# EAGLE board SmartTraffic (EAGLE 9.6.2)
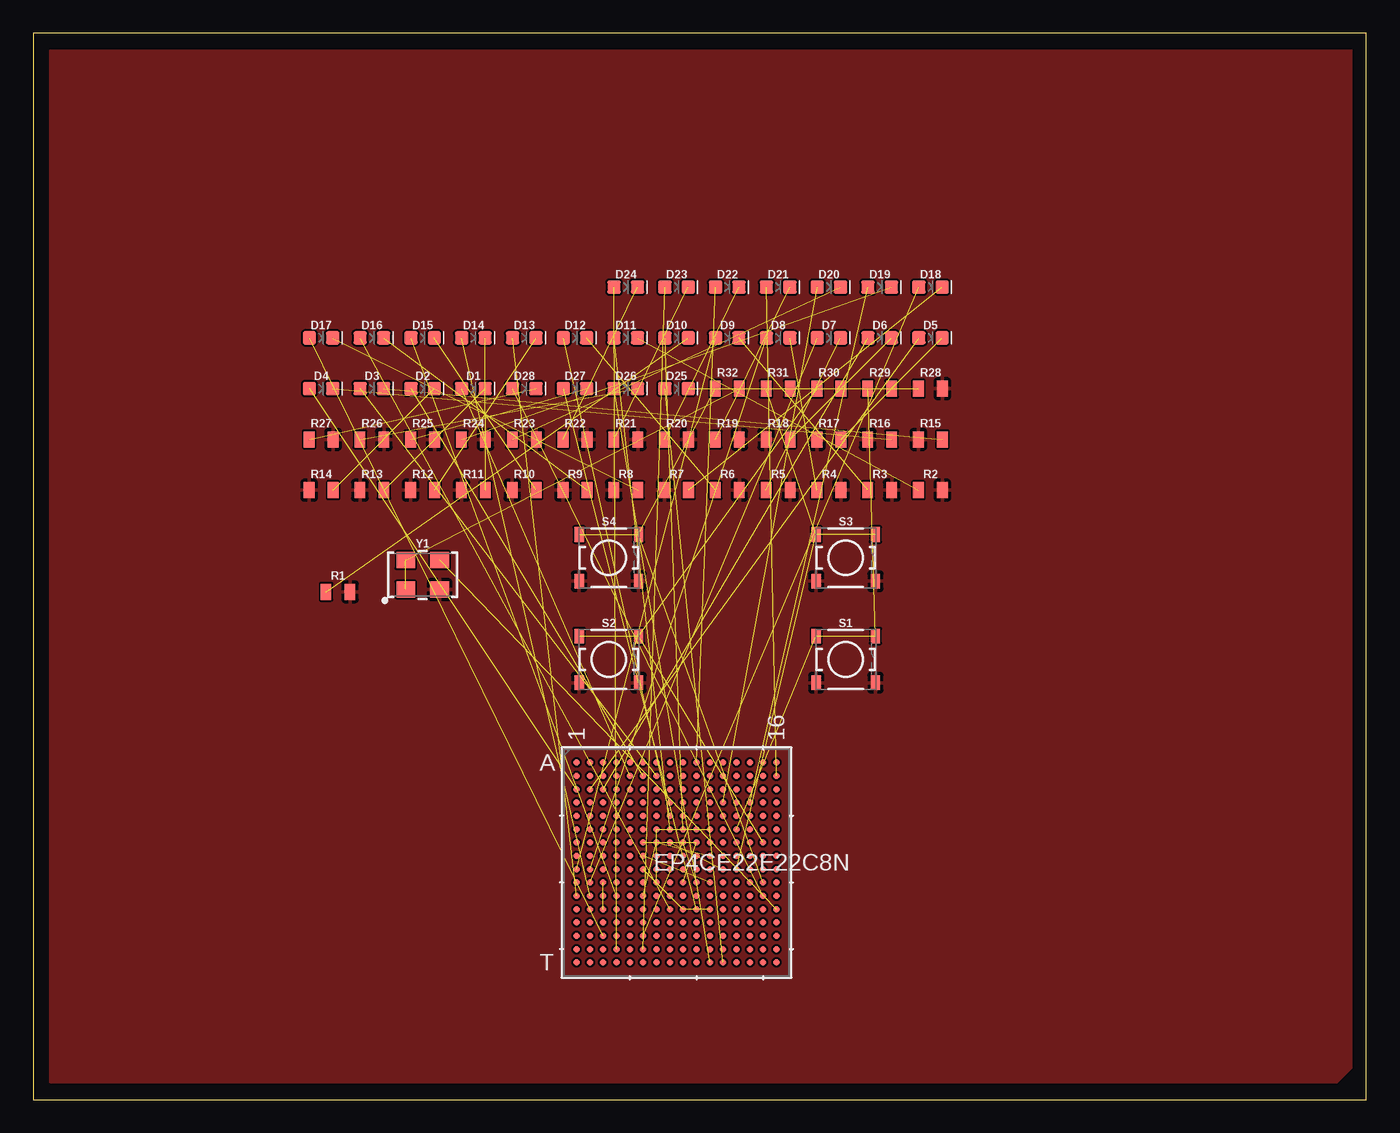
[diagram p0: board, top side]
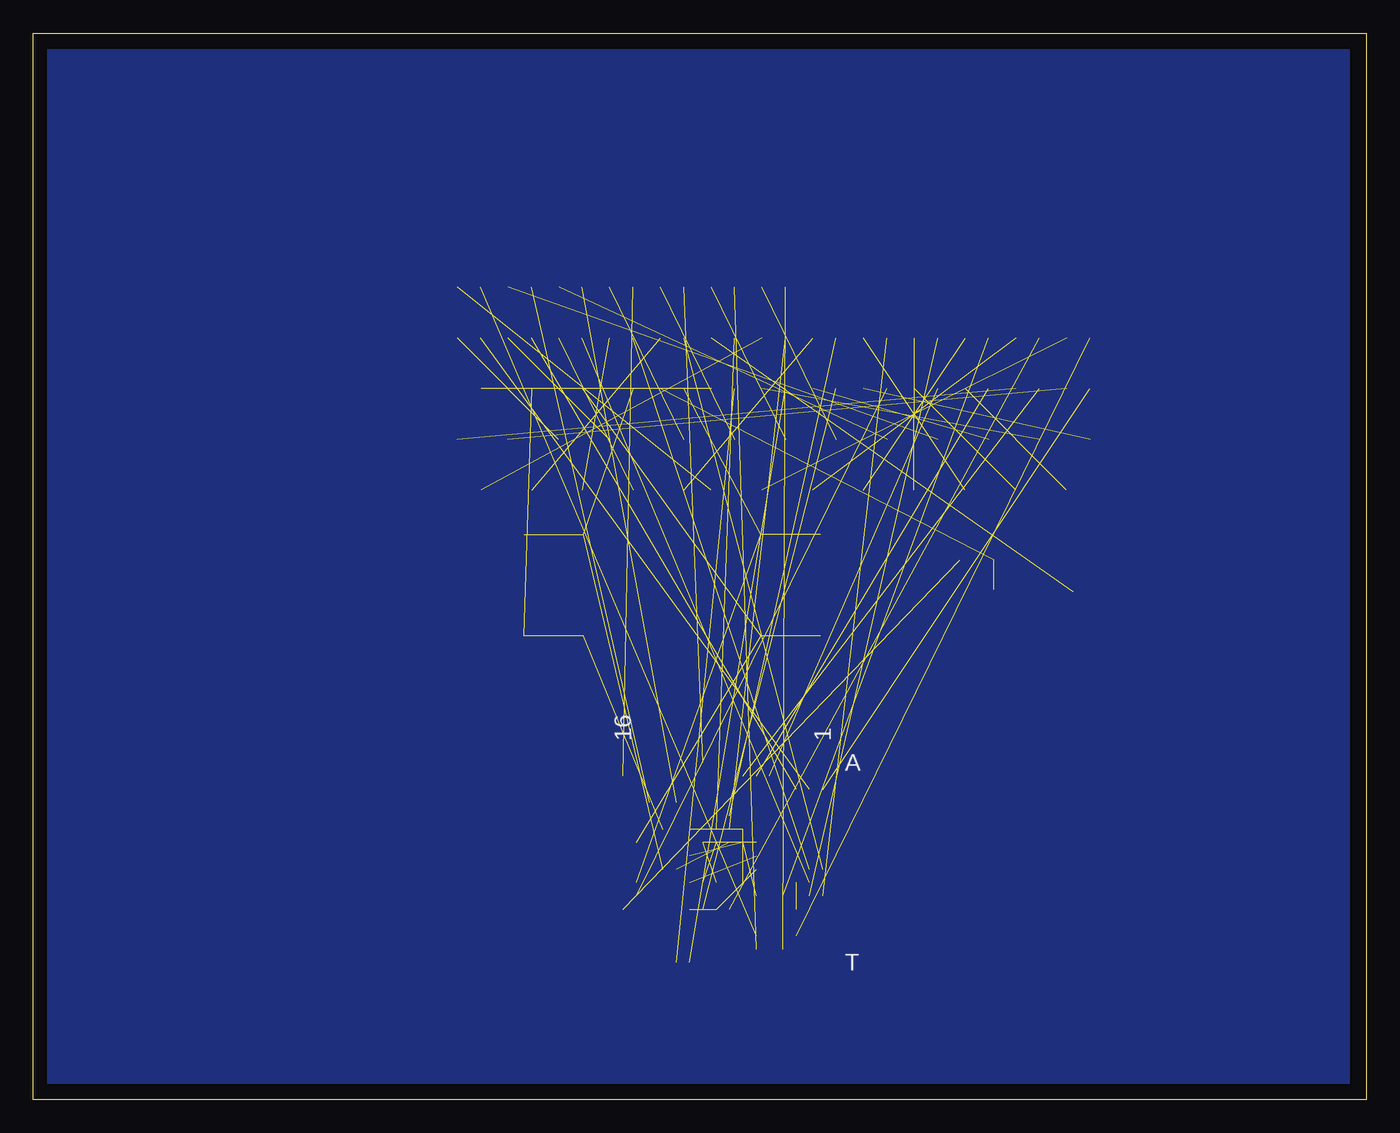
[diagram p1: board, bottom side, seen from below]

Size 100 x 80 mm. Coordinates in mm from the lower left corner, seen from the top.
Outline: 0,0 100,0 100,80 0,80 0,0
Copper layers (1*16): Top 0.035mm / dielectric 1.5mm / Bottom 0.035mm
Design rules "default": minimum track width 6mil, minimum drill 0.35mm, track to track 6mil, track to pad 6mil, pad to pad 6mil, via to via 6mil, smd to smd 6mil, copper to edge 40mil, drill to drill 6mil, minimum pad ring 10mil, minimum via ring 8mil, stop-mask expansion 4mil, vias tented up to drill 0mil, thermal gap 10mil

## Footprints (pad centres in the part's own frame; a part is rotated, then mirrored left to right if it is on the bottom)
LED-0603 = smd 1 x 1: A -0.877,0; C 0.877,0
0805 = smd 0.8 x 1.2: 1 -0.9,0; 2 0.9,0
TACTILE_SWITCH_SMD_4.5MM = smd 0.7 x 1.1: 1 2.225,1.75; 2 2.225,-1.75; 3 -2.225,-1.75; 4 -2.225,1.75
FBGA256_THIN_WIRE-BOND-A:1.55_ = smd 0.483 x 0.483: A1 -7.5,7.5; A2 -6.5,7.5; A3 -5.5,7.5; A4 -4.5,7.5; A5 -3.5,7.5; A6 -2.5,7.5; A7 -1.5,7.5; A8 -0.5,7.5; A9 0.5,7.5; A10 1.5,7.5; A11 2.5,7.5; A12 3.5,7.5; A13 4.5,7.5; A14 5.5,7.5; A15 6.5,7.5; A16 7.5,7.5; B1 -7.5,6.5; B2 -6.5,6.5; B3 -5.5,6.5; B4 -4.5,6.5; B5 -3.5,6.5; B6 -2.5,6.5; B7 -1.5,6.5; B8 -0.5,6.5; B9 0.5,6.5; B10 1.5,6.5; B11 2.5,6.5; B12 3.5,6.5; B13 4.5,6.5; B14 5.5,6.5; B15 6.5,6.5; B16 7.5,6.5; C1 -7.5,5.5; C2 -6.5,5.5; C3 -5.5,5.5; C4 -4.5,5.5; C5 -3.5,5.5; C6 -2.5,5.5; C7 -1.5,5.5; C8 -0.5,5.5; C9 0.5,5.5; C10 1.5,5.5; C11 2.5,5.5; C12 3.5,5.5; C13 4.5,5.5; C14 5.5,5.5; C15 6.5,5.5; C16 7.5,5.5; D1 -7.5,4.5; D2 -6.5,4.5; D3 -5.5,4.5; D4 -4.5,4.5; D5 -3.5,4.5; D6 -2.5,4.5; D7 -1.5,4.5; D8 -0.5,4.5; D9 0.5,4.5; D10 1.5,4.5; D11 2.5,4.5; D12 3.5,4.5; D13 4.5,4.5; D14 5.5,4.5; D15 6.5,4.5; D16 7.5,4.5; E1 -7.5,3.5; E2 -6.5,3.5; E3 -5.5,3.5; E4 -4.5,3.5; E5 -3.5,3.5; E6 -2.5,3.5; E7 -1.5,3.5; E8 -0.5,3.5; E9 0.5,3.5; E10 1.5,3.5; E11 2.5,3.5; E12 3.5,3.5; E13 4.5,3.5; E14 5.5,3.5; E15 6.5,3.5; E16 7.5,3.5; F1 -7.5,2.5; F2 -6.5,2.5; F3 -5.5,2.5; F4 -4.5,2.5; F5 -3.5,2.5; F6 -2.5,2.5; F7 -1.5,2.5; F8 -0.5,2.5; F9 0.5,2.5; F10 1.5,2.5; F11 2.5,2.5; F12 3.5,2.5; F13 4.5,2.5; F14 5.5,2.5; F15 6.5,2.5; F16 7.5,2.5; G1 -7.5,1.5; G2 -6.5,1.5; G3 -5.5,1.5; G4 -4.5,1.5; G5 -3.5,1.5; G6 -2.5,1.5; G7 -1.5,1.5; G8 -0.5,1.5; G9 0.5,1.5; G10 1.5,1.5; G11 2.5,1.5; G12 3.5,1.5; G13 4.5,1.5; G14 5.5,1.5; G15 6.5,1.5; G16 7.5,1.5; H1 -7.5,0.5; H2 -6.5,0.5; H3 -5.5,0.5; H4 -4.5,0.5; H5 -3.5,0.5; H6 -2.5,0.5; H7 -1.5,0.5; H8 -0.5,0.5; H9 0.5,0.5; H10 1.5,0.5; H11 2.5,0.5; H12 3.5,0.5; H13 4.5,0.5; H14 5.5,0.5; H15 6.5,0.5; H16 7.5,0.5; J1 -7.5,-0.5; J2 -6.5,-0.5; J3 -5.5,-0.5; J4 -4.5,-0.5; J5 -3.5,-0.5; J6 -2.5,-0.5; J7 -1.5,-0.5; J8 -0.5,-0.5; J9 0.5,-0.5; J10 1.5,-0.5; J11 2.5,-0.5; J12 3.5,-0.5; J13 4.5,-0.5; J14 5.5,-0.5; J15 6.5,-0.5; J16 7.5,-0.5; K1 -7.5,-1.5; K2 -6.5,-1.5; K3 -5.5,-1.5; K4 -4.5,-1.5; K5 -3.5,-1.5; K6 -2.5,-1.5; K7 -1.5,-1.5; K8 -0.5,-1.5; K9 0.5,-1.5; K10 1.5,-1.5; K11 2.5,-1.5; K12 3.5,-1.5; K13 4.5,-1.5; K14 5.5,-1.5; K15 6.5,-1.5; K16 7.5,-1.5; L1 -7.5,-2.5; L2 -6.5,-2.5; L3 -5.5,-2.5; L4 -4.5,-2.5; L5 -3.5,-2.5; L6 -2.5,-2.5; L7 -1.5,-2.5; L8 -0.5,-2.5; L9 0.5,-2.5; L10 1.5,-2.5; L11 2.5,-2.5; L12 3.5,-2.5; L13 4.5,-2.5; L14 5.5,-2.5; L15 6.5,-2.5; L16 7.5,-2.5; M1 -7.5,-3.5; M2 -6.5,-3.5; M3 -5.5,-3.5; M4 -4.5,-3.5; M5 -3.5,-3.5; M6 -2.5,-3.5; M7 -1.5,-3.5; M8 -0.5,-3.5; M9 0.5,-3.5; M10 1.5,-3.5; M11 2.5,-3.5; M12 3.5,-3.5; M13 4.5,-3.5; M14 5.5,-3.5; M15 6.5,-3.5; M16 7.5,-3.5; N1 -7.5,-4.5; N2 -6.5,-4.5; N3 -5.5,-4.5; N4 -4.5,-4.5; N5 -3.5,-4.5; N6 -2.5,-4.5; N7 -1.5,-4.5; N8 -0.5,-4.5; N9 0.5,-4.5; N10 1.5,-4.5; N11 2.5,-4.5; N12 3.5,-4.5; N13 4.5,-4.5; N14 5.5,-4.5; N15 6.5,-4.5; N16 7.5,-4.5; P1 -7.5,-5.5; P2 -6.5,-5.5; P3 -5.5,-5.5; P4 -4.5,-5.5; P5 -3.5,-5.5; P6 -2.5,-5.5; P7 -1.5,-5.5; P8 -0.5,-5.5; P9 0.5,-5.5; P10 1.5,-5.5; P11 2.5,-5.5; P12 3.5,-5.5; P13 4.5,-5.5; P14 5.5,-5.5; P15 6.5,-5.5; P16 7.5,-5.5; R1 -7.5,-6.5; R2 -6.5,-6.5; R3 -5.5,-6.5; R4 -4.5,-6.5; R5 -3.5,-6.5; R6 -2.5,-6.5; R7 -1.5,-6.5; R8 -0.5,-6.5; R9 0.5,-6.5; R10 1.5,-6.5; R11 2.5,-6.5; R12 3.5,-6.5; R13 4.5,-6.5; R14 5.5,-6.5; R15 6.5,-6.5; R16 7.5,-6.5; T1 -7.5,-7.5; T2 -6.5,-7.5; T3 -5.5,-7.5; T4 -4.5,-7.5; T5 -3.5,-7.5; T6 -2.5,-7.5; T7 -1.5,-7.5; T8 -0.5,-7.5; T9 0.5,-7.5; T10 1.5,-7.5; T11 2.5,-7.5; T12 3.5,-7.5; T13 4.5,-7.5; T14 5.5,-7.5; T15 6.5,-7.5; T16 7.5,-7.5
OSCILLATOR-SMD-5X3.2 = smd 1.397 x 1.194: 1 -1.27,-1.1; 2 1.27,-1.1; 3 1.27,1.1; 4 -1.27,1.1

## Placement (x,y rotation side)
D1  GREEN  [LED-0603]  33.02,53.34 0 top
D2  GREEN  [LED-0603]  29.21,53.34 0 top
D3  GREEN  [LED-0603]  25.4,53.34 0 top
D4  GREEN  [LED-0603]  21.59,53.34 0 top
D5  GREEN  [LED-0603]  67.31,57.15 0 top
D6  GREEN  [LED-0603]  63.5,57.15 0 top
D7  GREEN  [LED-0603]  59.69,57.15 0 top
D8  GREEN  [LED-0603]  55.88,57.15 0 top
D9  GREEN  [LED-0603]  52.07,57.15 0 top
D10  GREEN  [LED-0603]  48.26,57.15 0 top
D11  GREEN  [LED-0603]  44.45,57.15 0 top
D12  GREEN  [LED-0603]  40.64,57.15 0 top
D13  RED  [LED-0603]  36.83,57.15 0 top
D14  RED  [LED-0603]  33.02,57.15 0 top
D15  RED  [LED-0603]  29.21,57.15 0 top
D16  RED  [LED-0603]  25.4,57.15 0 top
D17  RED  [LED-0603]  21.59,57.15 0 top
D18  RED  [LED-0603]  67.31,60.96 0 top
D19  RED  [LED-0603]  63.5,60.96 0 top
D20  RED  [LED-0603]  59.69,60.96 0 top
D21  RED  [LED-0603]  55.88,60.96 0 top
D22  RED  [LED-0603]  52.07,60.96 0 top
D23  RED  [LED-0603]  48.26,60.96 0 top
D24  RED  [LED-0603]  44.45,60.96 0 top
D25  Yellow  [LED-0603]  48.26,53.34 0 top
D26  Yellow  [LED-0603]  44.45,53.34 0 top
D27  Yellow  [LED-0603]  40.64,53.34 0 top
D28  Yellow  [LED-0603]  36.83,53.34 0 top
R1  220  [0805]  22.86,38.1 0 top
R2  220  [0805]  67.31,45.72 0 top
R3  220  [0805]  63.5,45.72 0 top
R4  220  [0805]  59.69,45.72 0 top
R5  220  [0805]  55.88,45.72 0 top
R6  220  [0805]  52.07,45.72 0 top
R7  220  [0805]  48.26,45.72 0 top
R8  220  [0805]  44.45,45.72 0 top
R9  220  [0805]  40.64,45.72 0 top
R10  220  [0805]  36.83,45.72 0 top
R11  220  [0805]  33.02,45.72 0 top
R12  220  [0805]  29.21,45.72 0 top
R13  220  [0805]  25.4,45.72 0 top
R14  220  [0805]  21.59,45.72 0 top
R15  220  [0805]  67.31,49.53 0 top
R16  220  [0805]  63.5,49.53 0 top
R17  220  [0805]  59.69,49.53 0 top
R18  220  [0805]  55.88,49.53 0 top
R19  220  [0805]  52.07,49.53 0 top
R20  220  [0805]  48.26,49.53 0 top
R21  220  [0805]  44.45,49.53 0 top
R22  220  [0805]  40.64,49.53 0 top
R23  220  [0805]  36.83,49.53 0 top
R24  220  [0805]  33.02,49.53 0 top
R25  220  [0805]  29.21,49.53 0 top
R26  220  [0805]  25.4,49.53 0 top
R27  220  [0805]  21.59,49.53 0 top
R28  220  [0805]  67.31,53.34 0 top
R29  220  [0805]  63.5,53.34 0 top
R30  220  [0805]  59.69,53.34 0 top
R31  220  [0805]  55.88,53.34 0 top
R32  220  [0805]  52.07,53.34 0 top
S1  MOMENTARY-SWITCH-SPST-SMD-4.5MM  [TACTILE_SWITCH_SMD_4.5MM]  60.96,33.02 0 top
S2  MOMENTARY-SWITCH-SPST-SMD-4.5MM  [TACTILE_SWITCH_SMD_4.5MM]  43.18,33.02 0 top
S3  MOMENTARY-SWITCH-SPST-SMD-4.5MM  [TACTILE_SWITCH_SMD_4.5MM]  60.96,40.64 0 top
S4  MOMENTARY-SWITCH-SPST-SMD-4.5MM  [TACTILE_SWITCH_SMD_4.5MM]  43.18,40.64 0 top
U1  EP4CE22E22C8N  [FBGA256_THIN_WIRE-BOND-A:1.55_]  48.26,17.78 0 top
Y1  OSCILLATORSMD-5X3  [OSCILLATOR-SMD-5X3.2]  29.21,39.37 0 top

## Library data of the parts
D1-D12 = SparkFun-LED; PROD_ID: DIO-00821
D13-D24 = SparkFun-LED; PROD_ID: DIO-00819
D25-D28 = SparkFun-LED; PROD_ID: DIO-09003
R1-R32 = SparkFun-Resistors; PROD_ID: RES-09883
S1-S4 = SparkFun-Switches; PROD_ID: SWCH-09213
U1 = untitled; COPYRIGHT: Copyright (C) 2022 Ultra Librarian. All rights reserved.; MANUFACTURER_PART_NUMBER: EP4CE22E22C8N; MFR_NAME: Intel
Y1 = SparkFun-Clocks

## Nets
GND: R1.2 R2.2 R3.2 R4.2 R5.2 R6.2 R7.1 R8.1 R9.1 R10.1 R11.1 R12.1 R13.1 R14.1 R15.1 R16.1 R17.1 R18.1 R19.2 R20.2 R21.2 R22.2 R23.2 R24.2 R25.2 R26.2 R27.2 R28.2 S1.2 S1.3 S2.2 S2.3 S3.2 S3.3 S4.2 S4.3 Y1.2
N$1: D10.A U1.F9
N$2: D10.C R1.1
N$3: D3.A U1.B7
N$4: D3.C R15.2
N$5: D4.A U1.C1
N$6: D5.A U1.C2
N$7: D2.A U1.B6
N$8: D1.A U1.B5
N$9: D6.A U1.C3
N$10: D1.C R13.2
N$11: D2.C R14.2
N$12: D4.C R16.2
N$13: D5.C R17.2
N$14: D6.C R18.2
N$15: D11.A U1.F8
N$16: D12.A U1.E8
N$17: D12.C R6.1
N$18: D9.A U1.J1
N$19: D8.A U1.J2
N$20: D11.C R2.1
N$21: D9.C R3.1
N$22: D8.C R4.1
N$23: D7.C R5.1
N$24: D7.A U1.K2
N$25: D27.C R25.1
N$26: D27.A U1.M10
N$27: D25.A U1.T12
N$28: R29.1 S1.1 S1.4 U1.F13
N$29: R30.1 S2.1 S2.4 U1.G15
N$30: D16.A U1.M8
N$31: D17.A U1.P3
N$32: D18.A U1.P6
N$33: D15.A U1.L4
N$34: D14.A U1.L2
N$35: D13.A U1.L1
N$36: D13.C R12.2
N$37: D14.C R11.2
N$38: D15.C R10.2
N$39: D16.C R9.2
N$40: D17.C R8.2
N$41: D18.C R7.2
N$42: R31.1 S3.1 S3.4 U1.J13
N$43: R32.1 S4.1 S4.4 U1.K15
N$44: D26.A U1.T11
N$45: D24.A U1.R4
N$46: D23.A U1.R6
N$47: D22.A U1.A10
N$48: D21.A U1.B16
N$49: D20.A U1.D12
N$50: D19.A U1.D14
N$51: D22.C R20.1
N$52: D23.C R21.1
N$53: D24.C R22.1
N$54: D21.C R19.1
N$55: D20.C R23.1
N$56: D26.C R26.1
N$57: D19.C R24.1
N$58: U1.M16 Y1.3
N$64: D28.A U1.L15
N$65: D28.C R27.1
N$68: D25.C R28.1
VCC: R29.2 R30.2 R31.2 R32.2 Y1.1 Y1.4
VCCA1: U1.L5
VCCA2: U1.F12
VCCA3: U1.F5
VCCA4: U1.L12
VCCD_PLL1: U1.N4
VCCD_PLL2: U1.D13
VCCD_PLL3: U1.D4
VCCD_PLL4: U1.N13
VCCINT: U1.J6 U1.M9 U1.M11
VCCINT_2: U1.F7 U1.F11 U1.K7
VCCINT_3: U1.G6 U1.G10 U1.K9
VCCINT_4: U1.G7 U1.H11 U1.L6
VCCINT_5: U1.G8 U1.J12
VCCINT_6: U1.G9 U1.K10
VCCINT_7: U1.H6 U1.K11
VCCIO1: U1.G3
VCCIO1_2: U1.E3
VCCIO2: U1.K3 U1.M3
VCCIO3: U1.T1
VCCIO3_2: U1.P4
VCCIO3_3: U1.P7
VCCIO4: U1.T16
VCCIO4_2: U1.P10
VCCIO4_3: U1.P13
VCCIO5: U1.M14
VCCIO5_2: U1.K14
VCCIO6: U1.G14
VCCIO6_2: U1.E14
VCCIO7: U1.C13
VCCIO7_2: U1.A16
VCCIO7_3: U1.C10
VCCIO8: U1.C7
VCCIO8_2: U1.A1
VCCIO8_3: U1.C4

## Tracks (layer width: path | path; a pad name or v marks a point on that pad's centre or on a via)
GND
  pour Top: 1.27,1.27 1.27,78.74 99.06,78.74 99.06,2.54 97.79,1.27
  pour Bottom: 1.27,1.27 1.27,78.74 99.06,78.74 99.06,1.27
N$1  (1 unrouted)
N$2  (1 unrouted)
N$3  (1 unrouted)
N$4  (1 unrouted)
N$5  (1 unrouted)
N$6  (1 unrouted)
N$7  (1 unrouted)
N$8  (1 unrouted)
N$9  (1 unrouted)
N$10  (1 unrouted)
N$11  (1 unrouted)
N$12  (1 unrouted)
N$13  (1 unrouted)
N$14  (1 unrouted)
N$15  (1 unrouted)
N$16  (1 unrouted)
N$17  (1 unrouted)
N$18  (1 unrouted)
N$19  (1 unrouted)
N$20  (1 unrouted)
N$21  (1 unrouted)
N$22  (1 unrouted)
N$23  (1 unrouted)
N$24  (1 unrouted)
N$25  (1 unrouted)
N$26  (1 unrouted)
N$27  (1 unrouted)
N$28  (3 unrouted)
N$29  (3 unrouted)
N$30  (1 unrouted)
N$31  (1 unrouted)
N$32  (1 unrouted)
N$33  (1 unrouted)
N$34  (1 unrouted)
N$35  (1 unrouted)
N$36  (1 unrouted)
N$37  (1 unrouted)
N$38  (1 unrouted)
N$39  (1 unrouted)
N$40  (1 unrouted)
N$41  (1 unrouted)
N$42  (3 unrouted)
N$43  (3 unrouted)
N$44  (1 unrouted)
N$45  (1 unrouted)
N$46  (1 unrouted)
N$47  (1 unrouted)
N$48  (1 unrouted)
N$49  (1 unrouted)
N$50  (1 unrouted)
N$51  (1 unrouted)
N$52  (1 unrouted)
N$53  (1 unrouted)
N$54  (1 unrouted)
N$55  (1 unrouted)
N$56  (1 unrouted)
N$57  (1 unrouted)
N$58  (1 unrouted)
N$64  (1 unrouted)
N$65  (1 unrouted)
N$68  (1 unrouted)
VCC  (5 unrouted)
VCCINT  (2 unrouted)
VCCINT_2  (2 unrouted)
VCCINT_3  (2 unrouted)
VCCINT_4  (2 unrouted)
VCCINT_5  (1 unrouted)
VCCINT_6  (1 unrouted)
VCCINT_7  (1 unrouted)
VCCIO2  (1 unrouted)